# EAGLE board smd (EAGLE 7.2.0)
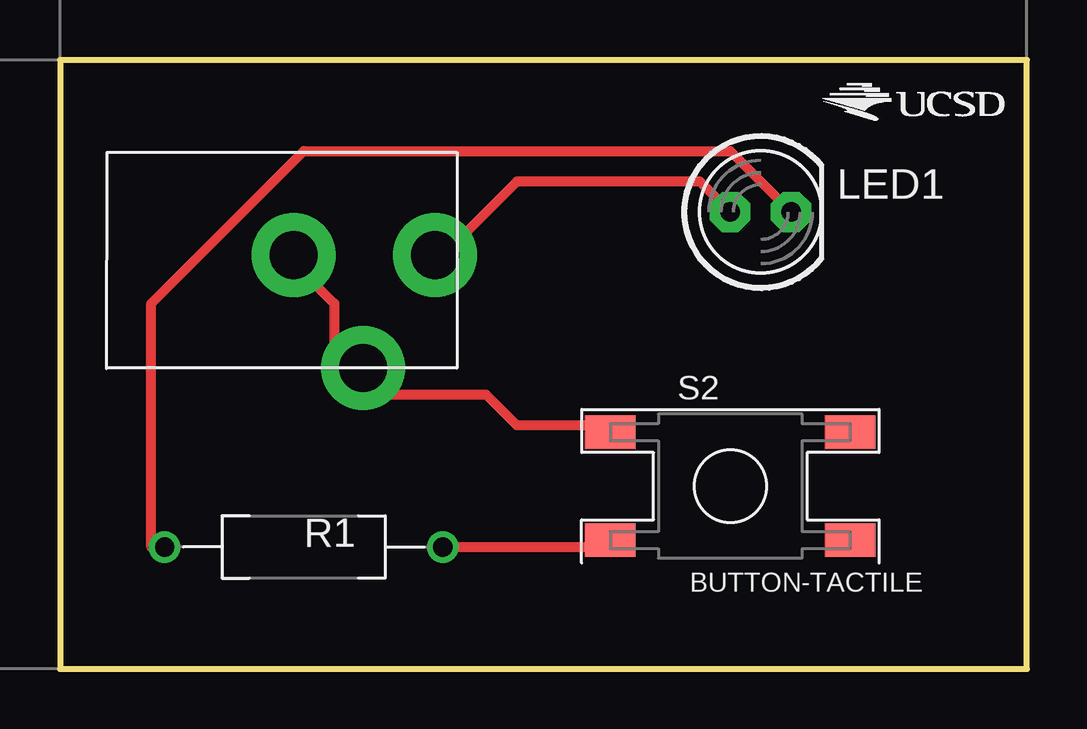
[diagram p0: board, top side]

Size 40.31 x 25.39 mm. Coordinates in mm from the lower left corner, seen from the top.
Outline: 0,0 40.31,0 40.31,25.39 0,25.39 0,0
Copper layers (1*16): Top 0.035559375mm / dielectric 1.501140625mm / Bottom 0.035559375mm
Design rules "4pcb-33board": minimum track width 6mil, minimum drill 15mil, track to track 6mil, track to pad 6mil, pad to pad 6mil, via to via 6mil, smd to smd 6mil, copper to edge 10mil, drill to drill 10mil, minimum pad ring 10mil, minimum via ring 8mil, stop-mask expansion 4mil, vias tented up to drill 0mil, thermal gap 10mil

## Footprints (pad centres in the part's own frame; a part is rotated, then mirrored left to right if it is on the bottom)
PJ-102A = drill 2 pad 3.5: RING -6.77,-4.345; RING_SW -3.87,-9.045; TIP -0.87,-4.345
LED5MM = drill 0.813 pad 1.676 octagon: A -1.27,0; K 1.27,0
RESAD1160W55L680D260_HS = drill 0.8 pad 1.2: 1 -5.8,0; 2 5.8,0
LSH1301.9315 = smd 2.1 x 1.4: P$1 -5,2.25; P$2 5,2.25; P$3 -5,-2.25; P$4 5,-2.25

## Placement (x,y rotation side)
J1  2.1MMJACKTHM  [PJ-102A]  16.51,21.59 0 top
LED1  Red  [LED5MM]  29.21,19.05 0 top
R1  330 Ohms  [RESAD1160W55L680D260_HS]  10.16,5.08 0 top
S2  BUTTON-TACTILE  [LSH1301.9315]  27.94,7.62 0 top
U$1  [UCS_LOGO]  31.75,22.86 0 top

## Library data of the parts
J1 LED1 R1 = Lab2
S2 U$1 = Conrad-Lab2

## Nets
N$1: J1.RING J1.RING_SW S2.P$1
N$2: R1.2 S2.P$3
N$3: LED1.K R1.1
N$4: J1.TIP LED1.A

## Tracks (layer width: path | path; a pad name or v marks a point on that pad's centre or on a via)
N$1
  Top 0.406: J1.RING 10.16,16.51 11.43,15.24 11.43,12.7 J1.RING_SW 12.7,11.43 17.78,11.43 19.05,10.16 22.86,10.16 S2.P$1
N$2
  Top 0.406: 22.94,5.08 S2.P$3 22.86,5.08 R1.2
N$3
  Top 0.406: R1.1 3.81,5.08 3.81,15.24 10.16,21.59 27.94,21.59 LED1.K
N$4
  Top 0.406: LED1.A 26.67,20.32 19.05,20.32 16.51,17.78 J1.TIP